# Altium PCB ДЗ.PcbDoc
Units mm, origin at the board's own origin, x right, y up, seen from the top; angles counter-clockwise.
Board outline 88.8 x 57.2 mm, 2 copper layers (Top Layer, Bottom Layer); 39 components, 26 nets, 123 pads, 5 vias.
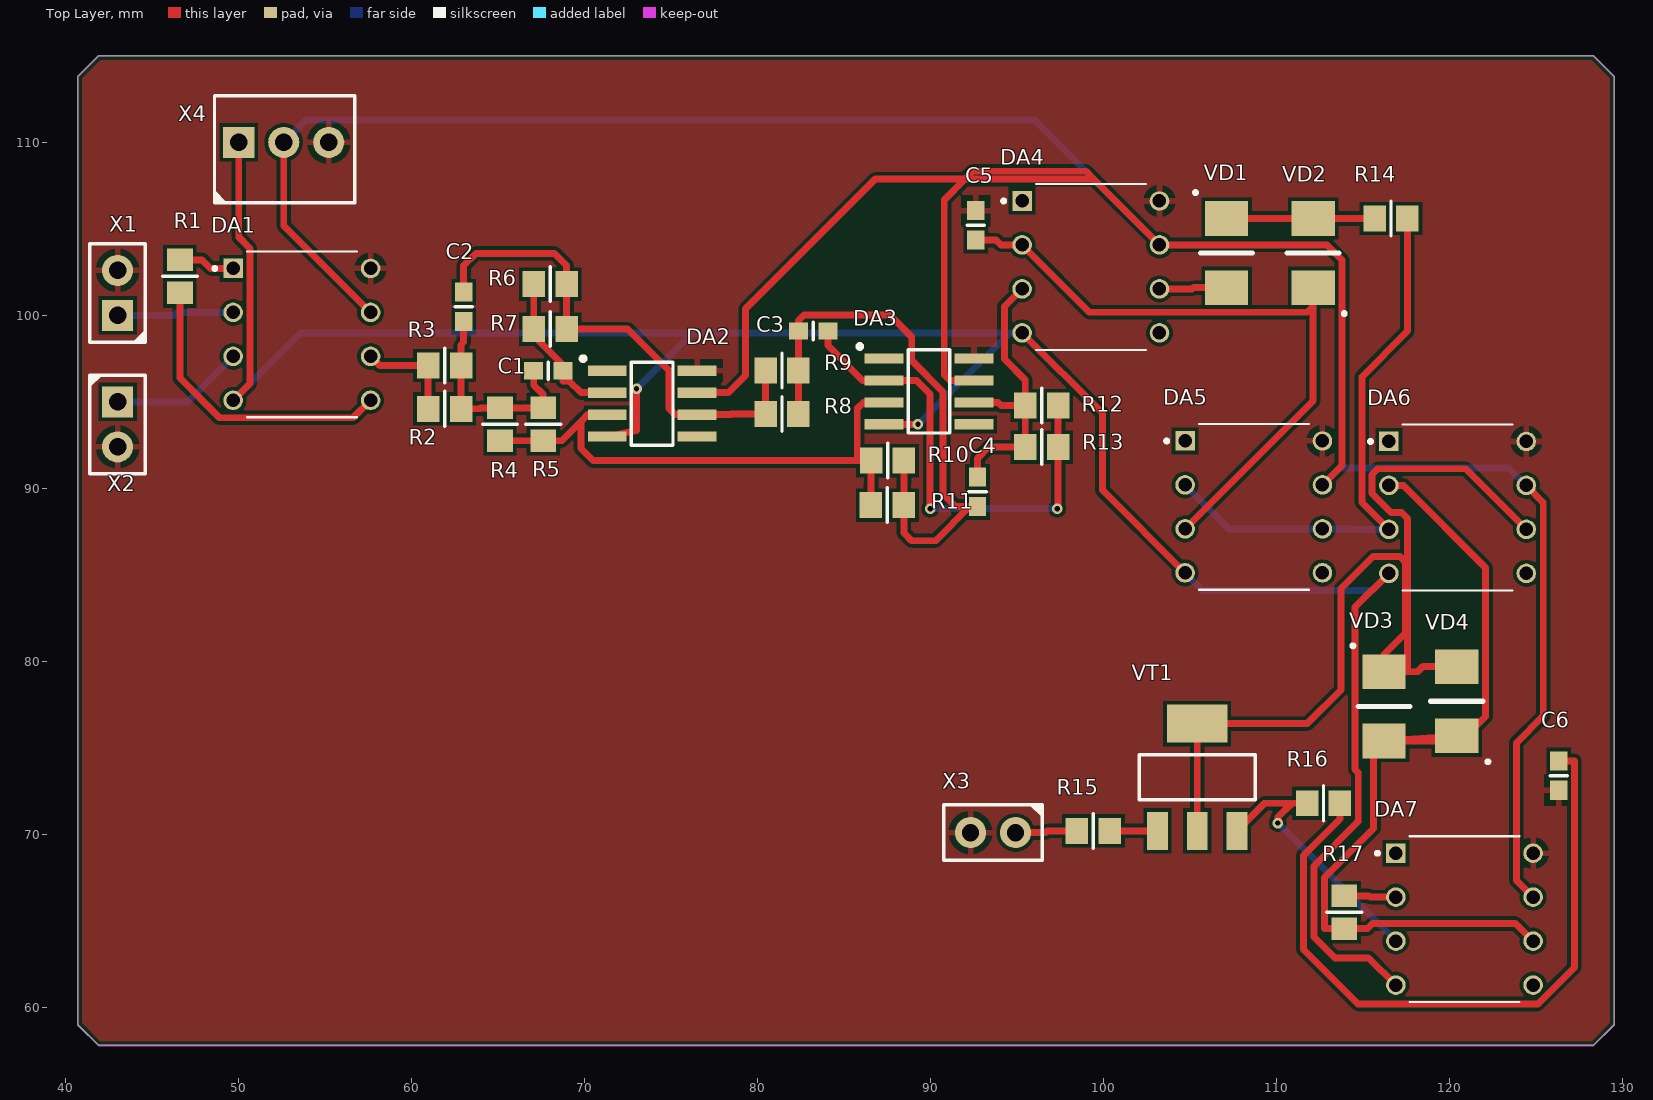
[diagram p0: Top Layer view]
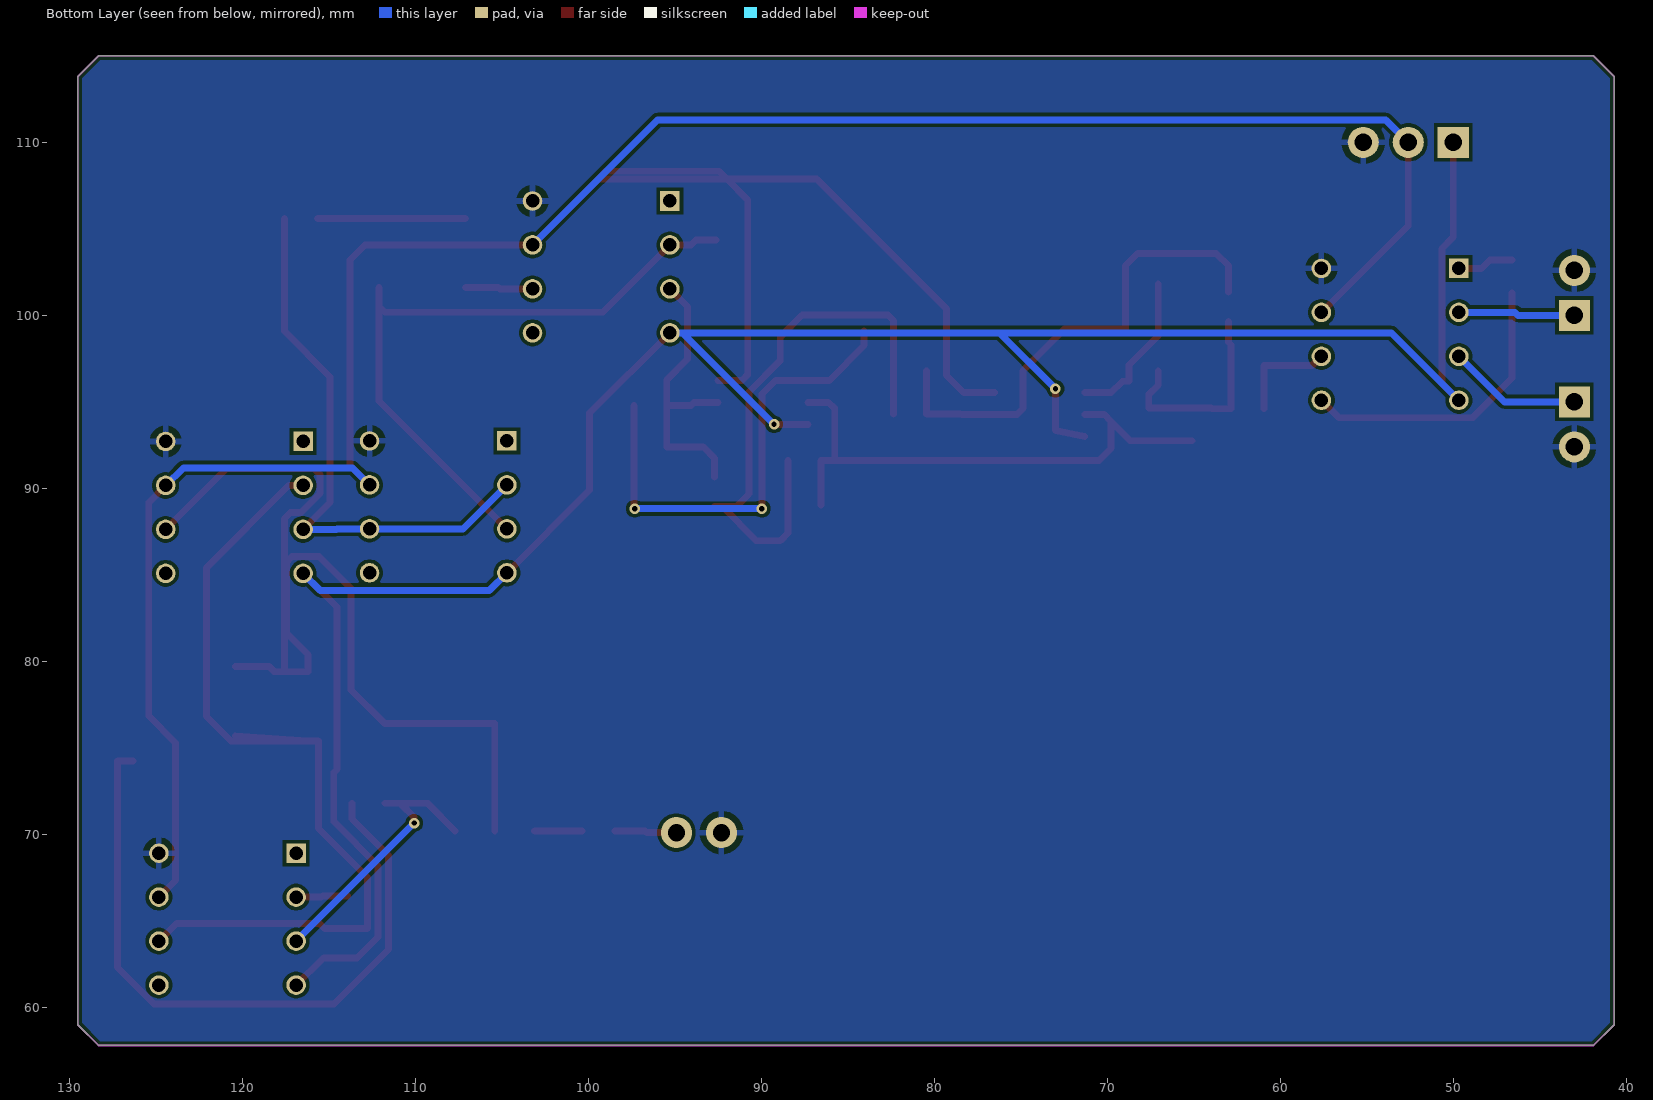
[diagram p1: Bottom Layer view, seen from below]
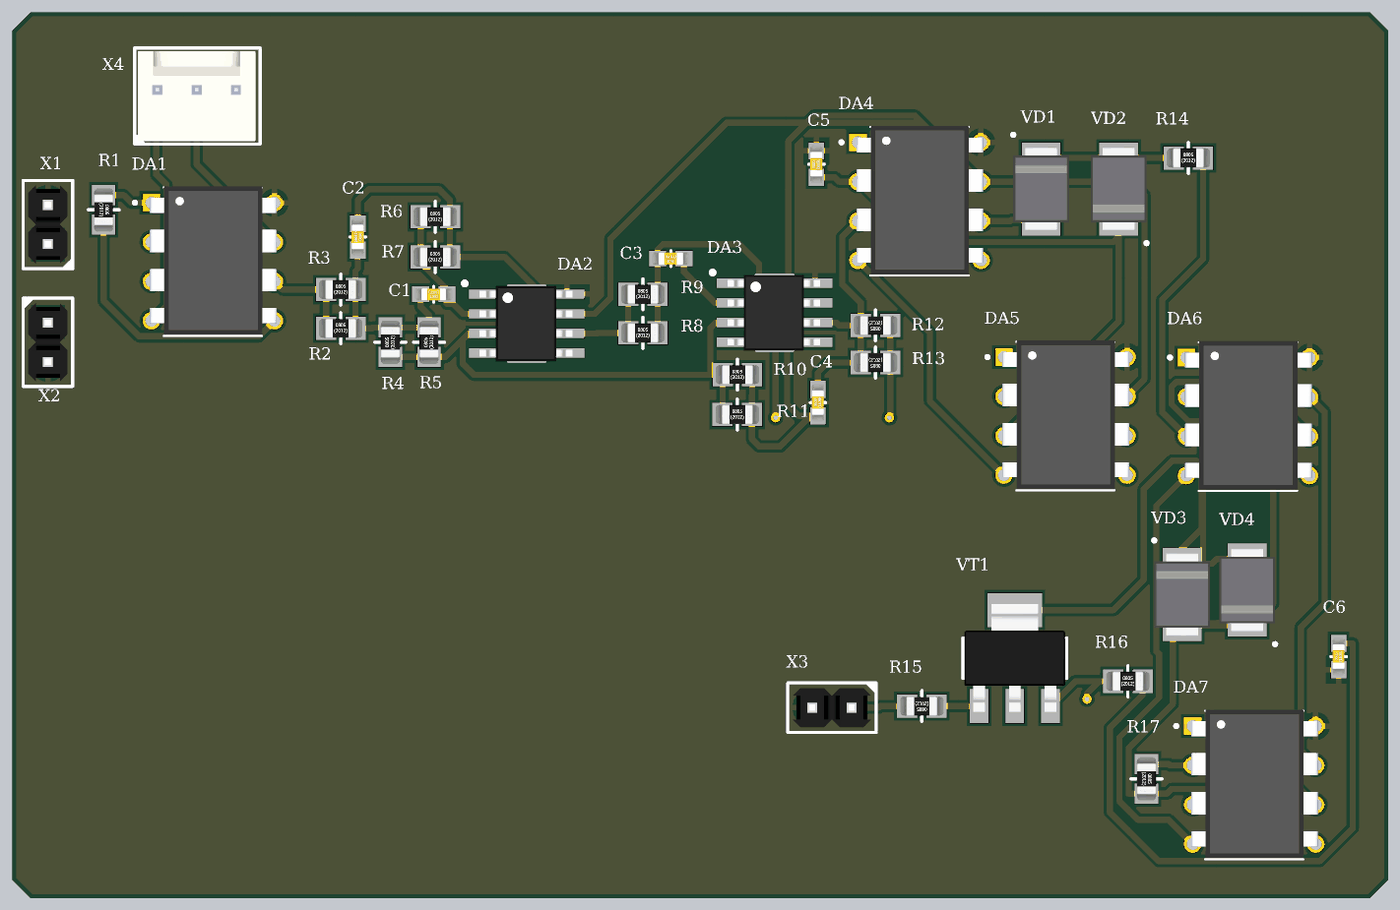
[diagram p2: 3D render of the assembled board from above, using the file's embedded part models]

## Layer stack, top to bottom
Top Solder: solder mask 0.0102, Solder Resist, Dk 3.5
Top Layer: signal copper 0.0356
Dielectric 1: dielectric 0.32, FR-4, Dk 4.8
Bottom Layer: signal copper 0.0356
Bottom Solder: solder mask 0.0102, Solder Resist, Dk 3.5

## Board outline
40.7,59 40.7,113.8 41.9,115 128.3,115 129.5,113.8 129.5,59 128.3,57.8 41.9,57.8

## Design rules (kind name [scope] priority, off if disabled: settings)
AcuteAngle [All] p1: minimum=3.50000000000000E+0001 checktracksonly=FALSE
BoardOutlineClearance "BoardOutlineClearance 1" [All] p1: gap=0.25 ignorepadtopadclearanceinfootprint=FALSE except(0: Arc-SplitContinuation Track-SplitContinuation SMDPad-SplitContinuation THPad-SplitContinuation Via-SplitContinuation Fill-SplitContinuation Poly-SplitContinuation Region-SplitContinuation Text-SplitContinuation) // Milling
BoardOutlineClearance "BoardOutlineClearance 2" [All] p2: gap=0.4 ignorepadtopadclearanceinfootprint=FALSE except(0: Arc-SplitContinuation Track-SplitContinuation SMDPad-SplitContinuation THPad-SplitContinuation Via-SplitContinuation Fill-SplitContinuation Poly-SplitContinuation Region-SplitContinuation Text-SplitContinuation) // V-Cut
Clearance "Clearance 3 Oz" [InNet('No Net') vs InNet('No Net')] p1: gap=0.35 ignorepadtopadclearanceinfootprint=FALSE except(0.25: Arc-Hole Track-Hole SMDPad-Hole THPad-Hole Via-Hole Fill-Hole Poly-Hole Region-Hole Text-Hole)
Clearance "Clearance 2 Oz" [InNet('No Net') vs InNet('No Net')] p2: gap=0.3 ignorepadtopadclearanceinfootprint=FALSE except(0.25: Arc-Hole Track-Hole SMDPad-Hole THPad-Hole Via-Hole Fill-Hole Poly-Hole Region-Hole Text-Hole)
Clearance "Clearance-1 1 Oz" [All] p3: gap=0.2 ignorepadtopadclearanceinfootprint=FALSE except(0.25: Arc-Hole Track-Hole SMDPad-Hole THPad-Hole Via-Hole Fill-Hole Poly-Hole Region-Hole Text-Hole) // Standart
Clearance "Clearance-2 1 Oz" [InNet('No Net') vs InNet('No Net')] p4: gap=0.15 ignorepadtopadclearanceinfootprint=FALSE except(0.2: Arc-Fill Arc-Poly Track-Fill Track-Poly SMDPad-Fill SMDPad-Poly THPad-Fill THPad-Poly Via-Fill Via-Poly Fill-Fill Fill-Poly Poly-Poly; 0.25: Arc-Hole Track-Hole SMDPad-Hole THPad-Hole Via-Hole Fill-Hole Poly-Hole Region-Hole Text-Hole) // Advance
Clearance "Clearance-1 1/2 Oz" [InNet('No Net') vs InNet('No Net')] p5: gap=0.125 ignorepadtopadclearanceinfootprint=FALSE except(0.2: Arc-Fill Arc-Poly Track-Fill Track-Poly SMDPad-SMDPad SMDPad-Fill SMDPad-Poly THPad-Fill THPad-Poly Via-Fill Via-Poly Fill-Fill Fill-Poly Poly-Poly Poly-Region Poly-Text; 0.25: Arc-Hole Track-Hole SMDPad-Hole THPad-Hole Via-Hole Fill-Hole Poly-Hole Region-Hole Text-Hole) // Standart
Clearance "Clearance-2 1/2 Oz" [InNet('No Net') vs InNet('No Net')] p6: gap=0.1 ignorepadtopadclearanceinfootprint=FALSE except(0.15: Arc-Fill Arc-Poly Track-Fill Track-Poly SMDPad-SMDPad SMDPad-Fill SMDPad-Poly THPad-Fill THPad-Poly Via-Fill Via-Poly Fill-Fill Fill-Poly Poly-Poly Poly-Region Poly-Text; 0.25: Arc-Hole Track-Hole SMDPad-Hole THPad-Hole Via-Hole Fill-Hole Poly-Hole Region-Hole Text-Hole) // Advance
DiffPairsRouting "DiffPairsRouting 1 Oz" [All] p1: maxlimit=0.254 minlimit=0.2 mostfreqgap=0.254 toplayer_minwidth=0.2 toplayer_maxwidth=0.381 toplayer_prefwidth=0.381 bottomlayer_minwidth=0.2 bottomlayer_maxwidth=0.381 bottomlayer_prefwidth=0.381 maxuncoupledlength=12.7
DiffPairsRouting "DiffPairsRouting 1/2 Oz" [All] p2: maxlimit=0.254 minlimit=0.1 mostfreqgap=0.254 toplayer_minwidth=0.1 toplayer_maxwidth=0.381 toplayer_prefwidth=0.381 bottomlayer_minwidth=0.1 bottomlayer_maxwidth=0.381 bottomlayer_prefwidth=0.381 maxuncoupledlength=12.7
HoleSize "Minimum HoleSize" [IsPad] p1: absolutevalues=TRUE maxlimit=5.9 minlimit=0.6 maxpercent=80.000 minpercent=20.000
HoleSize "Minimum HoleSize VIA 1" [IsVia] p2: absolutevalues=TRUE maxlimit=5.9 minlimit=0.3 maxpercent=80.000 minpercent=20.000 // Standart
HoleSize "Minimum HoleSize VIA 2" [IsVia] p3: absolutevalues=TRUE maxlimit=5.9 minlimit=0.2 maxpercent=80.000 minpercent=20.000 // Advance
HoleToHoleClearance Hole2HoleClearance [All] p1: gap=0.25 allowstackedmicrovias=FALSE
MinimumAnnularRing "Minimum AR VIA Standart" [IsVia] p1: minimumring=0.15
MinimumAnnularRing "Minimum AR PAD Standart" [IsPAD] p2: minimumring=0.2
MinimumAnnularRing "Minimum AR VIA Advance" [IsVia] p3: minimumring=0.1
MinimumAnnularRing "Minimum AR PAD Advance" [IsPAD] p4: minimumring=0.15
MinimumSolderMaskSliver "SolderMask Bridge Standart" [All] p1: minsoldermaskwidth=0.1 // All Masks
MinimumSolderMaskSliver "SolderMask Bridge Advance" [All] p2: minsoldermaskwidth=0.1 // Mask LDI
PlaneClearance "PlaneClearance 3 Oz" [InNet('No Net')] p1: clearance=0.35
PlaneClearance "PlaneClearance 2 Oz" [InNet('No Net')] p2: clearance=0.3
PlaneClearance "PlaneClearance 1 Oz" [All] p3: clearance=0.2
PlaneClearance "PlaneClearance-1 1/2 Oz" [InNet('No Net')] p4: clearance=0.2 // Standart
PlaneClearance "PlaneClearance-2 1/2 Oz" [InNet('No Net')] p5: clearance=0.15 // Advance
PlaneConnect "TermalConnect 3 Oz" [All] p1: planeconnectstyle=Relief reliefexpansion=0.2 reliefentries=4 reliefconductorwidth=0.35 reliefairgap=0.35 // Standart
PlaneConnect "TermalConnect 2 Oz" [All] p2: planeconnectstyle=Relief reliefexpansion=0.2 reliefentries=4 reliefconductorwidth=0.3 reliefairgap=0.3 // Standart
PlaneConnect "TermalConnect-1 1 Oz" [All] p3: planeconnectstyle=Relief reliefexpansion=0.2 reliefentries=4 reliefconductorwidth=0.2 reliefairgap=0.2 // Standart
PlaneConnect "TermalConnect-2 1 Oz" [All] p4: pad.planeconnectstyle=Relief pad.reliefexpansion=0.15 pad.reliefentries=4 pad.reliefconductorwidth=0.2 pad.reliefairgap=0.2 via.planeconnectstyle=Direct via.reliefexpansion=0.15 via.reliefentries=4 via.reliefconductorwidth=0.15 via.reliefairgap=0.15 // Advance
PlaneConnect "TermalConnect-1 1/2 Oz" [All] p5: planeconnectstyle=Relief reliefexpansion=0.2 reliefentries=4 reliefconductorwidth=0.2 reliefairgap=0.2 // Standart
PlaneConnect "TermalConnect-2 1/2 Oz" [All] p6: pad.planeconnectstyle=Relief pad.reliefexpansion=0.15 pad.reliefentries=4 pad.reliefconductorwidth=0.15 pad.reliefairgap=0.15 via.planeconnectstyle=Direct via.reliefexpansion=0.15 via.reliefentries=4 via.reliefconductorwidth=0.15 via.reliefairgap=0.15 // Advance
PolygonConnect "PolygonConnect 3 Oz" [All] p1: thpad.connectstyle=Relief thpad.reliefconductorwidth=0.35 thpad.reliefentries=4 thpad.polygonreliefangle="90 Angle" thpad.airgapwidth=0.35 smdpad.connectstyle=Relief smdpad.reliefconductorwidth=0.35 smdpad.reliefentries=4 smdpad.polygonreliefangle="90 Angle" smdpad.airgapwidth=0.35 via.connectstyle=Direct via.reliefconductorwidth=0.254 via.reliefentries=4 via.polygonreliefangle="90 Angle" via.airgapwidth=0.254
PolygonConnect "PolygonConnect 2 Oz" [InNet('No Net') vs InNet('No Net')] p2: thpad.connectstyle=Relief thpad.reliefconductorwidth=0.3 thpad.reliefentries=4 thpad.polygonreliefangle="90 Angle" thpad.airgapwidth=0.3 smdpad.connectstyle=Relief smdpad.reliefconductorwidth=0.3 smdpad.reliefentries=4 smdpad.polygonreliefangle="90 Angle" smdpad.airgapwidth=0.3 via.connectstyle=Direct via.reliefconductorwidth=0.254 via.reliefentries=4 via.polygonreliefangle="90 Angle" via.airgapwidth=0.254
PolygonConnect "PolygonConnect-1 1 Oz" [InNet('No Net') vs InNet('No Net')] p3: thpad.connectstyle=Relief thpad.reliefconductorwidth=0.2 thpad.reliefentries=4 thpad.polygonreliefangle="90 Angle" thpad.airgapwidth=0.2 smdpad.connectstyle=Relief smdpad.reliefconductorwidth=0.2 smdpad.reliefentries=4 smdpad.polygonreliefangle="90 Angle" smdpad.airgapwidth=0.2 via.connectstyle=Direct via.reliefconductorwidth=0.254 via.reliefentries=4 via.polygonreliefangle="90 Angle" via.airgapwidth=0.254 // Standart
PolygonConnect "PolygonConnect-2 1 Oz" [InNet('No Net') vs InNet('No Net')] p4: thpad.connectstyle=Relief thpad.reliefconductorwidth=0.15 thpad.reliefentries=4 thpad.polygonreliefangle="90 Angle" thpad.airgapwidth=0.15 smdpad.connectstyle=Relief smdpad.reliefconductorwidth=0.15 smdpad.reliefentries=4 smdpad.polygonreliefangle="90 Angle" smdpad.airgapwidth=0.15 via.connectstyle=Direct via.reliefconductorwidth=0.254 via.reliefentries=4 via.polygonreliefangle="90 Angle" via.airgapwidth=0.254 // Advance
PolygonConnect "PolygonConnect-1 1/2 Oz" [InNet('No Net') vs InNet('No Net')] p5: thpad.connectstyle=Relief thpad.reliefconductorwidth=0.15 thpad.reliefentries=4 thpad.polygonreliefangle="90 Angle" thpad.airgapwidth=0.2 smdpad.connectstyle=Relief smdpad.reliefconductorwidth=0.2 smdpad.reliefentries=4 smdpad.polygonreliefangle="90 Angle" smdpad.airgapwidth=0.2 via.connectstyle=Direct via.reliefconductorwidth=0.254 via.reliefentries=4 via.polygonreliefangle="90 Angle" via.airgapwidth=0.254 // Standart
PolygonConnect "PolygonConnect-2 1/2 Oz" [InNet('No Net') vs InNet('No Net')] p6: thpad.connectstyle=Relief thpad.reliefconductorwidth=0.125 thpad.reliefentries=4 thpad.polygonreliefangle="90 Angle" thpad.airgapwidth=0.15 smdpad.connectstyle=Relief smdpad.reliefconductorwidth=0.125 smdpad.reliefentries=4 smdpad.polygonreliefangle="90 Angle" smdpad.airgapwidth=0.15 via.connectstyle=Direct via.reliefconductorwidth=0.254 via.reliefentries=4 via.polygonreliefangle="90 Angle" via.airgapwidth=0.254 // Advance
RoutingCorners [All] p1 off: cornerstyle=45-Degree minsetback=2.54 maxsetback=2.54
RoutingVias [All] p1: holewidth=0.3 width=0.6 viastyle="Through Hole" minholewidth=0.2 minwidth=0.4 maxholewidth=5.9 maxwidth=6.4
SilkToSilkClearance Silk2SilkClearance [All] p1 off: silktosilkclearance=0.15
SilkToSolderMaskClearance Silk2SolderMaskClearance [IsPad] p1 off: minsilkscreentomaskgap=0.15 clearancetoexposedcopper=TRUE
SolderMaskExpansion SolderMaskExpansion-1 [All] p1: expansion=0.05 istentingtop=FALSE // Standart
SolderMaskExpansion "SolderMaskExpansion LDI" [All] p2: expansion=0.025 istentingtop=FALSE // Advance
UnRoutedNet [All] p1: checkbadconnections=TRUE
Width "Width 3 Oz" [All] p1: maxlimit=10 minlimit=0.3 preferedwidth=0.4 minimp=50.000000 maximp=50.000000 favimp=50.000000 checkconnectedcopper=TRUE
Width "Width 2 Oz" [All] p2: maxlimit=10 minlimit=0.3 preferedwidth=0.35 minimp=50.000000 maximp=50.000000 favimp=50.000000 checkconnectedcopper=TRUE
Width "Width 1 Oz" [All] p3: maxlimit=10 minlimit=0.15 preferedwidth=0.2 checkconnectedcopper=TRUE
Width "Width 1/2 Oz" [All] p4: maxlimit=10 minlimit=0.1 preferedwidth=0.125 checkconnectedcopper=TRUE
20 further rules are at their usual default settings.

## Components (designator, comment, footprint, x,y, rotation, side; value= is the part's Value field where it differs from the comment)
C1 "1нФ 50V 0603 ±10%" "CAP: SMD 0603 MD IPC 782" 67.9,96.8 r180 top
C2 "1нФ 50V 0603 ±10%" "CAP: SMD 0603 MD IPC 782" 63,100.5 r270 top
C3 "1нФ 50V 0603 ±10%" "CAP: SMD 0603 MD IPC 782" 83.2,99.1 r180 top
C4 "1нФ 50V 0603 ±10%" "CAP: SMD 0603 MD IPC 782" 92.7,89.8 r90 top
C5 "12пФ 50V 0603 ±10%" "CAP: SMD 0603 MD IPC 782" 92.6,105.2 r90 top
C6 "12пФ 50V 0603 ±10%" "CAP: SMD 0603 MD IPC 782" 126.3,73.4 r90 top
DA1 "LF411" "IC: PDIP-8" 53.6,98.9 r0 top
DA2 "LF157" "IC: SOIC 8" 73.9,94.9 r0 top
DA3 "LF157" "IC: SOIC 8" 89.9,95.6 r0 top
DA4 "LF411" "IC: PDIP-8" 99.2,102.8 r0 top
DA5 "LF411" "IC: PDIP-8" 108.62,88.93 r0 top
DA6 "LF411" "IC: PDIP-8" 120.4,88.9 r0 top
DA7 "LF411" "IC: PDIP-8" 120.8,65.1 r0 top
R1 "511 Ом ±1% 0805" "RES: SMD 0805 MD IPC 782" 46.6,102.25 r270 top
R2 "12 кОм ±1% 0805" "RES: SMD 0805 MD IPC 782" 61.9,94.6 r0 top
R3 "30 кОм ±1% 0805" "RES: SMD 0805 MD IPC 782" 61.9,97.1 r0 top
R4 "130 Ом ±1% 0805" "RES: SMD 0805 MD IPC 782" 65.1,93.7 r90 top
R5 "2 кОм ±1% 0805" "RES: SMD 0805 MD IPC 782" 67.6,93.7 r90 top
R6 "91 кОм ±1% 0805" "RES: SMD 0805 MD IPC 782" 68,101.8 r0 top
R7 "33 кОм ±1% 0805" "RES: SMD 0805 MD IPC 782" 68,99.2 r0 top
R8 "7.5 кОм ±1% 0805" "RES: SMD 0805 MD IPC 782" 81.4,94.3 r0 top
R9 "619 кОм ±1% 0805" "RES: SMD 0805 MD IPC 782" 81.4,96.8 r0 top
R10 "3 кОм ±1% 0805" "RES: SMD 0805 MD IPC 782" 87.5,91.6 r0 top
R11 "110 Ом ±1% 0805" "RES: SMD 0805 MD IPC 782" 87.493,89.03 r0 top
R12 "22 кОм ±1% 0805" "RES: SMD 0805 MD IPC 782" 96.41,94.786 r180 top
R13 "470 кОм ±1% 0805" "RES: SMD 0805 MD IPC 782" 96.41,92.386 r180 top
R14 "47 кОм ±1% 0805" "RES: SMD 0805 MD IPC 782" 116.6,105.6 r0 top
R15 "1 кОм ±1% 0805" "RES: SMD 0805 MD IPC 782" 99.4,70.2 r180 top
R16 "10k ±1% 0805" "RES: SMD 0805 MD IPC 782" 112.7,71.8 r0 top
R17 "10 кОм ±1% 0805" "RES: SMD 0805 MD IPC 782" 113.9,65.5 r270 top
VD1 "1N3595" "DIODE: SMB" 107.1,103.6 r90 top
VD2 "1N3595" "DIODE: SMB" 112.1,103.6 r270 top
VD3 "1N3595" "DIODE: SMB" 116.199,77.4 r90 top
VD4 "1N3595" "DIODE: SMB" 120.4,77.7 r270 top
VT1 "BCP56" "IC: SOT 223" 105.4,73.3 r90 top
X1 "PLS-2" "CON: 2PIN PLS 2"#1 43,101.3 r90 top
X2 "PLS-2" "CON: 2PIN PLS 2"#1 43,93.7 r270 top
X3 "PLS-2" "CON: 2PIN PLS 2"#2 93.6,70.1 r180 top
X4 "WF-3" "CON: 3pin wf-3" 52.6,109.6 r0 top

## Footprints (in the part's own frame and the unit in brackets; to place one, negate y for a bottom-side part, rotate by r counter-clockwise, add the part's x,y. Pads: shape width x height; smd on the part's side, far side on the other; paste and mask are expansions set on the pad)
"CAP: SMD 0603 MD IPC 782" [mm]
  rect 1.1x1 smd: 1(-0.85,0) 2(0.85,0)
  silkscreen extent 0,-0.5 0,0.5, body extent -1.23,-0.4 1.23,0.4, height 0.8
"CON: 2PIN PLS 2"#1 [mm]
  rect 1.8x1.8 hole 1: 1(-1.3,0)
  round 1.8 hole 1: 2(1.3,0)
  silkscreen extent -2.85,-1.6 2.85,1.6, body extent -2.54,-1.27 2.54,1.27, height 7.83
"CON: 2PIN PLS 2"#2 [mm]
  round 1.8 hole 1: 1(-1.3,0) 2(1.3,0)
  silkscreen extent -2.85,-1.6 2.85,1.6, body extent -2.54,-1.27 2.54,1.27, height 7.83
"CON: 3pin wf-3" [mm]
  rect 1.8x1.8 hole 1: 1(-2.6,0.4)
  round 1.8 hole 1: 2(0,0.4) 3(2.6,0.4)
  silkscreen extent -4,-3.1 4.1,3.1, body extent -3.81,-2.9 3.81,2.9, height 11.56
"DIODE: SMB" [mm]
  rect 2x2.5 smd: 1(2,0) 2(-2,0)
  silkscreen extent 0,-1.5 3.6,1.9, body extent -2.7,-1.8 2.7,1.8, height 2.3
"IC: PDIP-8" [mm]
  rect 1.13x1.13 hole 0.78: 1(-3.92,3.81)
  round 1.13 hole 0.78: 2(-3.92,1.27) 3(-3.92,-1.27) 4(-3.92,-3.81) 5(4.02,-3.81) 6(4.02,-1.27) 7(4.02,1.27) 8(4.02,3.81)
  silkscreen extent -5.08,-4.79 3.22,4.79, body extent -4.03,-4.71 4.17,4.87, height 5.08
"IC: SOIC 8" [mm]
  rect 2.25x0.6 smd: 1(-2.6,1.905) 2(-2.6,0.635) 3(-2.6,-0.635) 4(-2.6,-1.905) 5(2.6,-1.905) 6(2.6,-0.635) 7(2.6,0.635) 8(2.6,1.905)
  silkscreen extent -4.1,-2.4 1.2,2.7, body extent -3.05,-2.45 2.95,2.45, height 1.75
"IC: SOT 223" [mm]
  rect 2.2x1.2 smd: 1(-3.1,2.3) 2(-3.1,0) 3(-3.1,-2.3)
  rect 2.2x3.5 smd: 4(3.1,0)
  silkscreen extent -1.3,-3.35 1.3,3.35, body extent -3.48,-3.25 3.48,3.25, height 1.9
"RES: SMD 0805 MD IPC 782" [mm]
  rect 1.3x1.5 smd: 1(-0.95,0) 2(0.95,0)
  silkscreen extent 0,-1 0,1, body extent -1.4,-0.62 1.4,0.63, height 0.8

## Part data
C1 C2 C3 C4 C5 C6: library part "47p 50V 0603 ±10%", Code=6279259841, Name="Конденсатор X7R 50V 0,047uF +-10% 0603"
R1: library part "510 ±1% 0805", Code=6069137191, Name="Резистор 510R±1%  0805"
R2: library part "15k ±1% 0805", Code=6027162091, Name="Резистор RT0805FRE1015KL, Yageo"
R3: library part "20k ±1% 0805", Code=6094357581, Name="Резистор 20K±1% 0805"
R4 R5 R10 R11: library part "100k ±1% 0805", Code=6094357811, Name="Резистор 100K±1% 0805"
R6 R7 R8 R9 R12 R13 R14 R15 R17: library part "2k ±1% 0805", Code=6094352561, Name="Резистор 2k±1%  0805"
VD1 VD2 VD3 VD4: library part "Rectifier 1A 40V", Code=6349982351, Name="Диод VS-10BQ040-M35BT, Vishay"
VT1: library part "BJT NPN BCP56", Code=6341295616, Name="Транзистор BCP56-16 ITC, Infinion"
X1 X2 X3: library part "2 pin PLS 2", Code=6313952321, Name="Вилка PLS-2"
X4: library part "3 pin WF-3", Code=6313932013, Name="Вилка WF-3"
R16: Code=6020003061, Name="Резистор RC0805JR-0710KL"

## Via types
v1: diameter 0.6, hole 0.3, Top Layer to Bottom Layer, 5 vias

## Nets (pads, with @x,y where several pads share a name; then routed paths per layer and width w, separated by ;. In a path a pad name is that pad's centre, name@x,y a point inside that pad or via, vN(x,y) a via of type N, cw(c..) or ccw(c..) an arc to the next point about the centre after c; other vN are vias at no path point)
+12V: DA1.7 DA2.7 DA3.7 DA4.7 DA5.7 DA6.7 DA7.7 X4.2 | length 185.4
  Top Layer w0.4: X4.2 52.6,105.19 DA1.7 ; DA2.7 78.314,95.535 79.299,96.52 79.299,100.381 86.792,107.874 91.973,107.874 ; DA3.7 91.123,96.235 90.78,96.578 90.78,106.68 91.973,107.874 ; DA5.7 113.767,91.327 113.767,103.2 112.897,104.07 DA4.7 99.416,107.874 ; DA6.7 125.4,89.19 125.4,76.835 123.85,75.286 123.85,67.34 DA7.7 ; 91.973,107.874 92.431,108.331 98.959,108.331 99.416,107.874 ; 91.973,107.874 99.416,107.874
  Bottom Layer w0.4: X4.2 53.903,111.303 95.987,111.303 DA4.7 ; DA5.7 113.626,91.186 123.404,91.186 DA6.7
-12V: DA1.4 DA2.4 DA3.4 DA4.4 DA5.4 DA6.4 DA7.4 X4.1 | length 140.2
  Top Layer w0.4: DA1.4 50.648,96.058 50.648,103.873 50,104.521 X4.1 ; DA2.4 73,93.345 v1(73,95.758) ; DA3.4 89.25,93.695 v1(89.256,93.701) ; DA4.4 99.924,94.346 99.924,89.896 DA5.4 ; DA6.4 114.529,83.139 114.529,73.762 114.706,73.584 114.706,70.739 112.15,68.183 112.15,64.075 113.36,62.865 115.305,62.865 DA7.4
  Bottom Layer w0.4: DA1.4 53.58,98.99 76.232,98.99 ; v1(73,95.758) 76.232,98.99 ; v1(89.256,93.701) 94.545,98.99 ; DA4.4 94.545,98.99 ; DA5.4 105.721,84.099 115.489,84.099 DA6.4 ; 76.232,98.99 94.545,98.99
DIn: R15.2 X3.1 | length 3.6
  Top Layer w0.4: X3.1 96.622,70.1 96.722,70.2 R15.2
GND: C5.2 C6.1 DA1.8 DA2.8 DA3.8 DA4.8 DA5.8 DA6.8 DA7.8 X1.2 X2.2 X3.2 X4.3
NetC1_1: C1.1 DA2.2 R6.1 R7.1 | length 9.2
  Top Layer w0.4: R6.1 R7.1 67.05,98.83 68.75,97.13 C1.1 68.732,96.8 68.732,96.19 69.119,96.19 69.774,95.535 DA2.2
NetC1_2: C1.2 C2.2 R2.2 R3.2 R4.2 R5.2 | length 12.3
  Top Layer w0.4: C2.2 63,98.448 62.85,98.298 R3.2 R2.2 63.932,94.6 63.982,94.65 R4.2 R5.2 67.6,95.428 67.05,95.978 C1.2
NetC2_1: C2.1 DA2.6 R6.2 R7.2 R8.1 R9.1 | length 29.1
  Top Layer w0.4: C2.1 63,102.87 63.711,103.581 68.25,103.581 68.95,102.881 R6.2 R7.2 72.479,99.2 74.874,96.805 74.874,94.615 75.224,94.265 DA2.6 78.435,94.265 78.47,94.3 R8.1 R9.1
NetC3_1: C3.1 DA3.2 R12.1 R13.1 | length 27.9
  Top Layer w0.4: C3.1 84.05,98.247 86.062,96.235 DA3.2 89.179,96.235 89.967,95.448 v1(89.967,88.824) ; v1(97.309,88.824) 97.36,88.875 R13.1 R12.1
  Bottom Layer w0.4: v1(89.967,88.824) v1(97.309,88.824)
NetC3_2: C3.2 C4.1 R8.2 R9.2 R10.2 R11.2 | length 33.7
  Top Layer w0.4: R8.2 R9.2 C3.2 82.35,99.695 82.68,100.025 87.63,100.025 88.9,98.755 88.9,97.384 90.703,95.58 90.703,89.687 91.44,88.95 C4.1@92.249,88.95 ; R10.2 88.45,90.304 88.443,90.297 R11.2 88.443,87.427 88.9,86.97 90.269,86.97 C4.1@92.249,88.95 ; C4.1 C4.1@92.249,88.95
NetC4_2: C4.2 DA3.6 DA4.3 R12.2 R13.2 | length 17.2
  Top Layer w0.4: DA3.6 93.878,94.965 94.057,94.786 R12.2 ; C4.2 92.7,91.741 93.345,92.386 R13.2 R12.2 ; DA4.3 94.259,100.509 94.259,97.467 95.46,96.266 R12.2
NetC5_1: C5.1 DA4.2 DA5.3 VD2.1 | length 38.4
  Top Layer w0.4: C5.1 93.777,104.35 94.057,104.07 DA4.2 99.172,100.178 111.76,100.178 112.1,100.518 ; DA5.3 112.1,95.06 112.1,100.518 ; VD2.1 112.1,100.518
NetC6_2: C6.2 R16.2 | length 40
  Top Layer w0.4: R16.2 113.65,70.902 111.531,68.783 111.531,63.348 114.681,60.198 125.095,60.198 127.203,62.306 127.203,74.25 C6.2
NetDA1_1: DA1.1 R1.1 | length 3.3
  Top Layer w0.4: R1.1 47.879,103.2 48.369,102.71 DA1.1
NetDA1_2: DA1.2 X1.1 | length 6.8
  Bottom Layer w0.4: X1.1 46.253,100 46.423,100.17 DA1.2
NetDA1_3: DA1.3 X2.1 | length 7.8
  Bottom Layer w0.4: X2.1 47.05,95 DA1.3
NetDA1_5: DA1.5 R1.2 | length 17.3
  Top Layer w0.4: R1.2 46.6,96.368 48.886,94.082 56.612,94.082 DA1.5
NetDA1_6: DA1.6 R2.1 R3.1 | length 6
  Top Layer w0.4: DA1.6 58.15,97.1 R3.1 R2.1
NetDA2_3: DA2.3 DA3.3 R4.1 R5.1 R10.1 R11.1 | length 32.7
  Top Layer w0.4: R4.1 R5.1 68.652,92.75 69.774,93.871 ; DA2.3 70.168,94.265 69.774,93.871 ; R11.1 86.543,90.297 86.55,90.304 R10.1 85.75,91.6 ; DA3.3 86.1,94.965 85.75,94.615 85.75,91.6 ; 69.774,93.871 69.774,92.311 70.485,91.6 85.75,91.6
NetDA4_6: DA4.6 VD1.2 | length 3.9
  Top Layer w0.4: DA4.6 105.105,101.53 105.175,101.6 VD1.2
NetDA5_2: DA5.2 DA5.6 DA6.3 R14.2 | length 32.6
  Top Layer w0.4: DA6.3 114.915,89.195 114.915,96.449 117.55,99.084 R14.2
  Bottom Layer w0.4: DA5.2 107.24,87.66 DA5.6 114.529,87.66 114.559,87.63 DA6.3
NetDA6_2: DA6.2 DA7.6 R17.2 VD3.2 VD4.1 | length 52.1
  Top Layer w0.4: DA6.2 117.314,90.17 122.072,85.412 122.072,76.822 120.65,75.4 VD3.2 ; VD4.1 VD3.2 ; DA7.6 123.804,64.846 115.536,64.846 115.24,64.55 R17.2 112.75,64.55 112.75,67.5 115.595,70.345 115.595,75.4 VD3.2
NetDA6_6: DA6.6 VD3.1 VD4.2 VT1.2 VT1.4 | length 60.1
  Top Layer w0.4: VT1.2 VT1.4 111.76,76.4 113.716,78.356 113.716,84.201 115.57,86.055 117.119,86.055 117.45,85.725 117.45,81.641 116.199,80.391 VD3.1 117.551,79.4 ; VD4.2 118.436,79.7 118.135,79.4 117.551,79.4 ; DA6.6 120.915,91.135 115.845,91.135 115.515,90.805 115.515,89.692 116.611,88.595 117.221,88.595 117.551,88.265 117.551,79.4
NetDA7_2: DA7.2 R17.1 | length 3
  Top Layer w0.4: R17.1 115.341,66.45 115.421,66.37 DA7.2
NetDA7_3: DA7.3 R16.1 VT1.3 | length 15.8
  Top Layer w0.4: VT1.3 109.3,71.8 110.865,71.8 ; v1(110.058,70.652) 110.058,70.993 110.865,71.8 ; R16.1 110.865,71.8
  Bottom Layer w0.4: v1(110.058,70.652) DA7.3
NetR14_1: R14.1 VD1.1 VD2.2 | length 8.5
  Top Layer w0.4: VD1.1 VD2.2 R14.1
NetR15_1: R15.1 VT1.1 | length 2.8
  Top Layer w0.4: R15.1 VT1.1
pads on no net: DA2.1 DA2.5 DA3.1 DA3.5 DA4.1 DA4.5 DA5.1 DA5.5 DA6.1 DA6.5 DA7.1 DA7.5

## Polygon pours and split planes (outlines as drawn)
GND on Top Layer "GND_L01_P000" (solid, remove dead copper, pour order 0): 40.7,59 40.7,113.8 cw(c41.9,113.8) 41.9,115 128.3,115 129.5,113.8 129.5,59 128.3,57.8 41.9,57.8
GND on Bottom Layer "GND_L02_P001" (solid, remove dead copper, pour order 1): 40.7,59 40.7,113.8 41.9,115 128.3,115 129.5,113.8 129.5,59 128.3,57.8 41.9,57.8

## Keep-outs
Keep-Out Layer:
  lines w0.1: 40.7,59 40.7,110.2 40.7,113.8 41.9,115 128.3,115 129.5,113.8 129.5,59 128.3,57.8 41.9,57.8 40.7,59